# Altium PCB ramps.PcbDoc (part 2 of 2)
Units mil, origin at the board's own origin, x right, y up, seen from the top; angles counter-clockwise.
Board outline 3937.01 x 2440.94 mil, 2 copper layers (Top Layer, Bottom Layer); 96 components, 138 nets, 478 pads, 27 vias.
Unrouted connection lines stored in the file: 1.
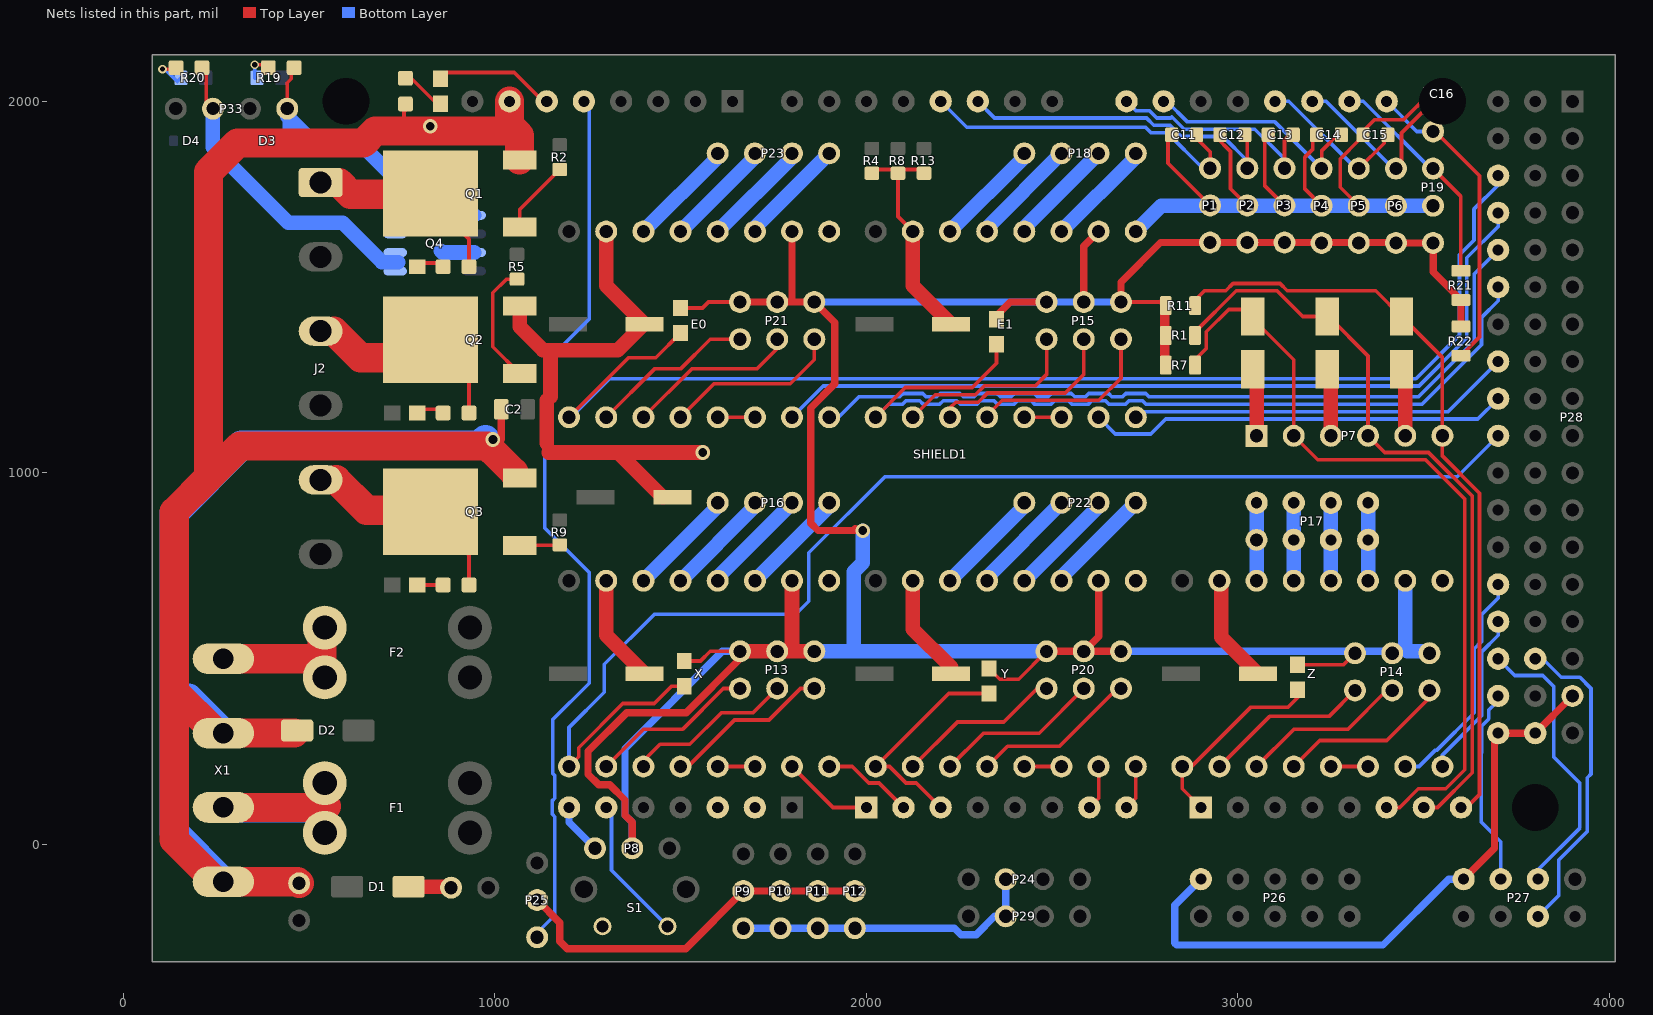
[diagram p2: the nets of this part, all layers, seen from the top]

## Via types
v1: diameter 23.62, hole 13.78, Top Layer to Bottom Layer, 20 vias
v2: diameter 39.37, hole 23.62, Top Layer to Bottom Layer, 6 vias
v3: diameter 50, hole 28, Top Layer to Bottom Layer, 1 vias

## Nets (pads, with @x,y where several pads share a name; then routed paths per layer and width w, separated by ;. In a path a pad name is that pad's centre, name@x,y a point inside that pad or via, vN(x,y) a via of type N, cw(c..) or ccw(c..) an arc to the next point about the centre after c; other vN are vias at no path point) (continued)
E0-DIR: E0.DIR SHIELD1.28 | length 2144.3
  Bottom Layer w9.84: E0.DIR@1900,1150 1925,1150 1980,1205 2089.52,1205 2098.5,1213.98 2151.5,1213.98 2160.48,1205 2189.52,1205 2198.5,1213.98 2251.5,1213.98 2260.48,1205 2289.52,1205 2298.5,1213.98 2351.5,1213.98 2360.48,1205 2389.52,1205 2398.5,1213.98 2451.5,1213.98 2460.48,1205 2489.52,1205 2498.5,1213.98 2551.5,1213.98 2560.48,1205 2589.52,1205 2598.5,1213.98 2651.5,1213.98 2660.48,1205 2689.52,1205 2698.5,1213.98 2751.5,1213.98 2760.48,1205 3485.68,1205 3635.55,1354.87 3635.55,1535.55 SHIELD1.28@3700,1600
E0-EN: E0.ENABLE R18.1 SHIELD1.24 | length 3353.5
  Top Layer w9.84: E0.ENABLE@1200,1150 1360,1310 1433.46,1310 R18.1@1500,1376.54
  Bottom Layer w9.84: E0.ENABLE@1200,1150 1205,1150 1308.74,1253.74 3478.74,1253.74 3596.18,1371.18 3596.18,1587.33 3635,1626.14 3635,1710 3700,1775 SHIELD1.24@3700,1800
E0-STEP: E0.STEP SHIELD1.26 | length 2275.9
  Bottom Layer w9.84: E0.STEP@1800,1150 1884.05,1234.06 3486.89,1234.06 3615.87,1363.03 3615.87,1579.17 3700,1663.31 SHIELD1.26@3700,1700
E1-DIR: E1.DIR SHIELD1.34 | length 1037.1
  Bottom Layer w9.84: E1.DIR@2725,1150 2740,1165 3565,1165 SHIELD1.34@3700,1300
E1-EN: E1.ENABLE R16.1 SHIELD1.30 | length 2373.3
  Top Layer w9.84: E1.ENABLE@2025,1150 2105,1230 2285,1230 2350,1295 R16.1@2350,1346.54
  Bottom Layer w9.84: E1.ENABLE@2025,1150 2060,1185 2097.36,1185 2106.65,1194.29 2143.35,1194.29 2152.32,1185.31 2197.68,1185.31 2206.65,1194.29 2243.35,1194.29 2252.32,1185.31 2297.68,1185.31 2306.65,1194.29 2343.35,1194.29 2352.32,1185.31 2397.68,1185.31 2406.65,1194.29 2443.35,1194.29 2452.32,1185.31 2497.68,1185.31 2506.65,1194.29 2543.35,1194.29 2552.32,1185.31 2597.68,1185.31 2606.65,1194.29 2643.35,1194.29 2652.32,1185.31 2697.68,1185.31 2706.65,1194.29 2743.35,1194.29 2752.64,1185 3495,1185 3655.24,1345.24 3655.24,1418.54 3700,1463.31 SHIELD1.30@3700,1500
E1-STEP: E1.STEP SHIELD1.36 | length 1133
  Bottom Layer w9.84: E1.STEP@2625,1150 2670,1105 2765,1105 2805.32,1145.31 3645.32,1145.31 SHIELD1.36@3700,1200
FAN1: D4.A LED5.C P33.2 Q4.5 Q4.6 | length 859.9
  Top Layer w9.84: LED5.C@223.98,2102.36 223.98,1994.13 P33.2@241.73,1976.38
  Bottom Layer w39.37: P33.2@241.73,1976.38 241.73,1876.38 444.88,1673.23 590.55,1673.23 696.85,1566.93 740.16,1566.93
FAN2: D3.A LED6.C P33.4 Q4.7 Q4.8 | length 729
  Top Layer w9.84: P33.4@441.73,1976.38 P33.4@441.73,1980.31 441.73,2049.96 452.76,2060.98 LED6.C@452.76,2102.36
  Bottom Layer w19.68: D3.A@438.98,1893.7 438.98,1977.56 P33.4@441.73,1980.31
  Bottom Layer w39.37: P33.4@441.73,1976.38 441.73,1959.84 527.56,1874.02 649.61,1874.02 732.28,1791.34 732.28,1657.48
FET1-: J2.1 LED4.C Q1.D | length 477.4
  Top Layer w9.84: Q1.D@810,1750 930.67,1629.33 LED4.C@930.67,1564.96
  Top Layer w78.74: J2.1@580.71,1781.5 612.2,1750 Q1.D@810,1750
FET2-: J2.3 LED3.C Q2.D | length 502.3
  Top Layer w9.84: Q2.D@826.77,1358.27 930.67,1254.37 LED3.C@930.67,1171.26
  Top Layer w78.74: J2.3@567.32,1381.5 638.82,1310 Q2.D@810,1310
FET3-: J2.5 LED2.C Q3.D | length 511.5
  Top Layer w9.84: Q3.D@810,900 930.67,779.33 LED2.C@930.67,708.66
  Top Layer w78.74: J2.5@573.62,981.5 655.12,900 Q3.D@810,900
GND: C1.- C2.2 C3.2 C4.2 C5.- C6.2 C7.2 C8.- C9.2 C10.2 C11.1 C12.1 C13.1 C14.1 C15.1 C16.1 D2.A E0.GND E0.GND2 E1.GND E1.GND2 LED1.C P1.2 P2.2 P3.2 P4.2 P5.2 P6.2 P7.1 P7.3 P7.5 P9.1 P10.1 P11.1 P12.1 P19.2 P24.2 P26.2 P27.7 P28.17 P29.2 P30.2 Q1.S Q2.S Q3.S Q4.1 Q4.3 R4.1 R8.1 R13.1 S1.1 SHIELD1.GND X1.2 X1.4 X.GND X.GND2 Y.GND Y.GND2 Z.GND Z.GND2 | length 15311.8
  Top Layer w9.84: 771.65,1923.94 755.91,1939.68 755.91,1972.87 LED1.C@775.59,1992.56 ; R4.1@2015,1816.54 R8.1@2085,1816.54 ; E1.GND@2125,1650 2085,1690 R8.1@2085,1816.54 ; R13.1@2155,1816.54 R8.1@2085,1816.54 ; C11.1@2811.54,1910 2811.54,1833.46 P1.2@2925,1720 ; C12.1@2941.54,1910 2941.54,1903.46 2980,1865 2980,1765 P2.2@3025,1720 ; C13.1@3071.54,1910 3071.54,1773.46 P3.2@3125,1720 ; C14.1@3201.54,1910 3201.54,1871.54 3180,1850 3180,1764 P4.2@3225,1719 ; P5.2@3325,1719 3275,1769 3275,1845 3326.54,1896.54 3326.54,1910 3366.54,1950 3445,1950 3515,2020 C16.1@3516.54,2020
  Top Layer w19.68: 1017.72,1090 C2.2@1017.72,1171.26 ; P27.7@3607,-93 3690,-10 3690,290 SHIELD1.GND@3700,300 SHIELD1.GND@3800,300 P28.17@3900,400
  Top Layer w39.37: Q2.S@1066.93,1448.82 1066.93,1393.07 1130,1330 1150,1330 ; 1140,1080 1140,1195 1150,1205 1150,1330 ; 1145,1055 1331.81,1055 ; X.GND@1300,710 1300,563.35 C7.2@1403.35,460 ; E0.GND@1300,1650 1300,1503.35 C3.2@1403.35,1400 1401.28,1400 1331.28,1330 1150,1330 ; C6.2@1451.77,935.04 1331.81,1055 ; v2(1560,1055) 1331.81,1055 ; Y.GND@2125,710 2125,580 2228.35,476.65 C9.2@2228.35,460 ; E1.GND@2125,1650 2125,1503.35 C4.2@2228.35,1400 ; Z.GND@2950,710 2955,705 2955,558.35 C10.2@3053.35,460 ; C5.-@3040,1279.13 3050,1269.13 P7.1@3050,1100 ; C1.-@3240,1279.13 3250,1269.13 P7.3@3250,1100 ; C8.-@3440,1279.13 3450,1269.13 P7.5@3450,1100
  Top Layer w78.74: D2.A@461.42,300 X1.2@269.68,300 250,300 137.8,412.2 ; P30.2@473.7,-104.09 469.61,-100 X1.4@269.68,-100 250,-100 137.8,12.2 137.8,412.2 ; 980.32,1072.83 314.96,1072.83 230,987.87 ; 992.13,1061.02 Q3.S@1051.18,1001.97 ; SHIELD1.GND@1040,2000 1040,1935 1055,1920 ; Q1.S@1066.93,1842.52 1066.93,1908.07 1055,1920 ; 137.8,412.2 137.8,895.67 230,987.87 ; 230,987.87 230,1810 307.8,1887.8 646.48,1887.8 678.68,1920 1055,1920
  Bottom Layer w19.68: P9.1@1669,-225 P10.1@1769,-225 P11.1@1869,-225 P12.1@1969,-225 2237.4,-225 2254.62,-242.21 2295.38,-242.21 2344.6,-193 P29.2@2375,-193 P24.2@2375,-93 ; P26.2@2900,-93 2830,-163 2830,-265 2835,-270 3390,-270 3567,-93 P27.7@3607,-93
  Bottom Layer w39.37: 854.33,1598.43 859.65,1593.11 Q4.3@944.88,1593.11 ; 862.2,1696.85 865.94,1693.11 Q4.1@944.88,1693.11 ; E1.GND2@2725,1650 2794,1719 P4.2@3225,1719 P5.2@3325,1719 P6.2@3425,1719 P19.2@3525,1719
  Bottom Layer w78.74: 175.98,393.7 X1.2@269.68,300 ; X1.4@269.68,-100 137.97,31.71 137.97,893.88 318.9,1074.8 960.12,1074.8 v2@975.32,1090
  other v2: 995,1090 826.77,1933.07
IOREF: P8.3 SHIELD1.IOREF | length 139
  Bottom Layer w19.68: SHIELD1.IOREF@1200,100 1200,60 P8.3@1270,-10
LED: R12.1 SHIELD1.13 | length 324.8
  Top Layer w9.84: R12.1@854.33,2061.02 871.06,2077.76 1052.24,2077.76 1130,2000 SHIELD1.13@1140,2000
MISO: P27.3 SHIELD1.50 | length 774.9
  Bottom Layer w9.84: SHIELD1.50@3700,500 3745,455 3820,455 3850,425 3850,235 3920,165 3920,45 3807,-68 P27.3@3807,-93
MOSI: P27.4 SHIELD1.51 | length 855.4
  Bottom Layer w9.84: SHIELD1.51@3800,500 3820,500 3870,450 3920,450 3950,420 3950,190 3940,180 3940,35 3862.71,-42.29 3862.71,-137.29 P27.4@3807,-193
NetD1_K: D1.K P32.2 | length 115.7
  Top Layer w39.37: D1.K@768.03,-113.39 880.16,-113.39 P32.2@882.68,-115.91
NetE0_1A: E0.1A P23.3 | length 292.8
  Bottom Layer w39.37: E0.1A@1600,1650 1800,1850 P23.3@1800,1860
NetE0_1B: E0.1B P23.4 | length 292.8
  Bottom Layer w39.37: E0.1B@1700,1650 1700,1660 P23.4@1900,1860
NetE0_2A: E0.2A P23.2 | length 292.8
  Bottom Layer w39.37: E0.2A@1500,1650 1700,1850 P23.2@1700,1860
NetE0_2B: E0.2B P23.1 | length 292.8
  Bottom Layer w39.37: E0.2B@1400,1650 1600,1850 P23.1@1600,1860
NetE0_MS1: E0.MS1 P21.1 | length 447
  Top Layer w9.84: E0.MS1@1300,1150 1430,1280 1500,1280 1580,1360 P21.1@1660,1360
NetE0_MS2: E0.MS2 P21.3 | length 461.6
  Top Layer w9.84: E0.MS2@1400,1150 1530,1280 1705,1280 1760,1335 P21.3@1760,1360
NetE0_MS3: E0.MS3 P21.5 | length 479.2
  Top Layer w9.84: E0.MS3@1500,1150 1590,1240 1795,1240 1860,1305 P21.5@1860,1360
NetE0_RESET: E0.RESET E0.SLEEP | length 100
  Top Layer w9.84: E0.RESET@1600,1150 E0.SLEEP@1700,1150
NetE1_1A: E1.1A P18.3 | length 292.8
  Bottom Layer w39.37: E1.1A@2425,1650 2425,1660 P18.3@2625,1860
NetE1_1B: E1.1B P18.4 | length 292.8
  Bottom Layer w39.37: E1.1B@2525,1650 2725,1850 P18.4@2725,1860
NetE1_2A: E1.2A P18.2 | length 292.8
  Bottom Layer w39.37: E1.2A@2325,1650 2325,1660 P18.2@2525,1860
NetE1_2B: E1.2B P18.1 | length 292.8
  Bottom Layer w39.37: E1.2B@2225,1650 2425,1850 P18.1@2425,1860
NetE1_MS1: E1.MS1 P15.1 | length 502.6
  Top Layer w9.84: E1.MS1@2125,1150 2185.32,1210.31 2293.15,1210.31 2317.84,1235 2455,1235 2485,1265 P15.1@2485,1360
NetE1_MS2: E1.MS2 P15.3 | length 517.3
  Top Layer w9.84: E1.MS2@2225,1150 2225,1175 2240.63,1190.63 2301.31,1190.63 2325.99,1215.31 2535.32,1215.31 2585,1265 P15.3@2585,1360
NetE1_MS3: E1.MS3 P15.5 | length 511.4
  Top Layer w9.84: E1.MS3@2325,1150 2325,1155 2365.63,1195.63 2625.63,1195.63 2685,1255 P15.5@2685,1360
NetE1_RESET: E1.RESET E1.SLEEP | length 100
  Top Layer w9.84: E1.RESET@2425,1150 E1.SLEEP@2525,1150
NetF1_1: F1.1 X1.3 | length 571.7
  Top Layer w39.37: X1.3@250,100 X1.3@269.68,100
  Top Layer w78.74: X1.3@269.68,100 543.46,100 546.77,103.31
  Bottom Layer w78.74: X1.3@269.68,100 271.42,98.27 542.52,98.27
NetF2_1: F2.1 X1.1 | length 333.9
  Top Layer w78.74: X1.1@250,500 535,500 F2.1@535,548.86
NetLED1_A: LED1.A R12.2 | length 107.1
  Top Layer w9.84: LED1.A@775.59,2062.09 844.12,1993.56 R12.2@854.33,1993.56
NetLED2_A: LED2.A R10.2 | length 69.3
  Top Layer w9.84: R10.2@796.87,698.66 LED2.A@866.14,698.66
NetLED3_A: LED3.A R6.2 | length 69.3
  Top Layer w9.84: R6.2@791.87,1171.26 LED3.A@861.14,1171.26
NetLED4_A: LED4.A R3.2 | length 69.3
  Top Layer w9.84: R3.2@791.87,1564.96 LED4.A@861.14,1564.96
NetLED5_A: LED5.A R20.2 | length 121.8
  Top Layer w9.84: v1(106.3,2086.61) 138.7,2086.61 LED5.A@154.45,2102.36
  Bottom Layer w9.84: v1(106.3,2086.61) 112.2,2086.61 145.67,2053.15 R20.2@155.51,2062.99
NetLED6_A: LED6.A R19.2 | length 69.8
  Top Layer w9.84: v1(354.33,2098.42) LED6.A@382.8,2098.42
  Bottom Layer w9.84: v1(354.33,2098.42) 354.33,2062.99 R19.2@360.24,2062.99
NetP13_1: P13.1 X.MS1 | length 447
  Top Layer w9.84: X.MS1@1300,210 1400,310 1505,310 1615,420 P13.1@1660,420
NetP13_3: P13.3 X.MS2 | length 455.8
  Top Layer w9.84: X.MS2@1400,210 1400,225 1445,270 1525,270 1610,355 1695,355 P13.3@1760,420
NetP13_5: P13.5 X.MS3 | length 447
  Top Layer w9.84: X.MS3@1500,210 1520,210 1645.32,335.32 1737.95,335.32 1822.64,420 P13.5@1860,420
NetP14_1: P14.1 Z.MS1 | length 449.9
  Top Layer w9.84: Z.MS1@2950,210 3085,345 3245,345 P14.1@3315,415
NetP14_3: P14.3 Z.MS2 | length 449.9
  Top Layer w9.84: Z.MS2@3050,210 3150,310 3295,310 3400,415 P14.3@3415,415
NetP14_5: P14.5 Z.MS3 | length 461.6
  Top Layer w9.84: Z.MS3@3150,210 3220,280 3400,280 3515,395 P14.5@3515,415
NetP16_1: P16.1 X.2B | length 292.8
  Bottom Layer w39.37: X.2B@1400,710 1600,910 P16.1@1600,920
NetP16_2: P16.2 X.2A | length 292.8
  Bottom Layer w39.37: X.2A@1500,710 1700,910 P16.2@1700,920
NetP16_3: P16.3 X.1A | length 292.8
  Bottom Layer w39.37: X.1A@1600,710 1600,720 P16.3@1800,920
NetP16_4: P16.4 X.1B | length 292.8
  Bottom Layer w39.37: X.1B@1700,710 1900,910 P16.4@1900,920
NetP17_1: P17.1 P17.2 Z.2B | length 210
  Bottom Layer w39.37: Z.2B@3050,710 P17.1@3050,820 P17.2@3050,920
NetP17_3: P17.3 P17.4 Z.2A | length 210
  Bottom Layer w39.37: Z.2A@3150,710 P17.3@3150,820 P17.4@3150,920
NetP17_5: P17.5 P17.6 Z.1A | length 210
  Bottom Layer w39.37: Z.1A@3250,710 P17.5@3250,820 P17.6@3250,920
NetP17_7: P17.7 P17.8 Z.1B | length 210
  Bottom Layer w39.37: Z.1B@3350,710 P17.7@3350,820 P17.8@3350,920
NetP20_1: P20.1 Y.MS1 | length 447
  Top Layer w9.84: Y.MS1@2125,210 2245,330 2370,330 2460,420 P20.1@2485,420
NetP20_3: P20.3 Y.MS2 | length 447
  Top Layer w9.84: Y.MS2@2225,210 2315,300 2465,300 P20.3@2585,420
NetP20_5: P20.5 Y.MS3 | length 447
  Top Layer w9.84: Y.MS3@2325,210 2380,265 2520,265 2675,420 P20.5@2685,420
NetP22_1: P22.1 Y.2B | length 282.8
  Bottom Layer w39.37: Y.2B@2225,710 P22.1@2425,910
NetP22_2: P22.2 Y.2A | length 302.8
  Bottom Layer w39.37: Y.2A@2325,710 2325,720 P22.2@2525,920 P22.2@2525,910
NetP22_3: P22.3 Y.1A | length 292.8
  Bottom Layer w39.37: Y.1A@2425,710 2625,910 P22.3@2625,920
NetP22_4: P22.4 Y.1B | length 292.8
  Bottom Layer w39.37: Y.1B@2525,710 2525,720 P22.4@2725,920
NetQ1_G: Q1.G R2.1 | length 199.9
  Top Layer w9.84: Q1.G@1066.93,1661.42 1066.93,1708.46 R2.1@1175,1816.54
NetQ2_G: Q2.G R5.1 | length 327.2
  Top Layer w9.84: R5.1@1060,1521.54 1031.54,1521.54 995,1485 995,1339.65 Q2.G@1066.93,1267.72
NetQ3_G: Q3.G R9.1 | length 108.7
  Top Layer w9.84: Q3.G@1066.93,805.12 1173.58,805.12 R9.1@1175,806.54
NetX_RESET: X.RESET X.SLEEP | length 100
  Top Layer w9.84: X.RESET@1600,210 X.SLEEP@1700,210
NetY_RESET: Y.RESET Y.SLEEP | length 100
  Top Layer w9.84: Y.RESET@2425,210 Y.SLEEP@2525,210
NetZ_RESET: Z.RESET Z.SLEEP | length 100
  Top Layer w9.84: Z.RESET@3250,210 Z.SLEEP@3350,210
PS-ON: P25.3 SHIELD1.12 | length 2426.5
  Bottom Layer w9.84: P25.3@1102.36,-249.21 1161.42,-190.16 1161.42,75.28 1155.24,81.46 1155.24,118.54 1161.42,124.72 1161.42,185.95 1155.71,191.65 1155.71,335.71 1254.13,434.13 1254.13,732.42 1135,851.56 1135,1295 1254.13,1414.13 1254.13,1985.87 SHIELD1.12@1240,2000
RESET: S1.2 SHIELD1.RESET | length 388.3
  Bottom Layer w9.84: SHIELD1.RESET@1300,100 1314.29,85.71 1314.29,-69.29 S1.2@1465,-220
SCK: P27.5 SHIELD1.52 | length 536.3
  Bottom Layer w9.84: SHIELD1.52@3700,400 3694.61,400 3694.61,381.77 3674.92,362.08 3674.92,338.23 3655.24,318.54 3655.24,247.4 3655,247.16 3655,60 3707,8 P27.5@3707,-93
SCL: P19.4 R22.2 SHIELD1.SCL | length 837.9
  Top Layer w9.84: P19.4@3525,1919 3531,1919 3650,1800 3650,1365.63 R22.2@3600,1315.63
  Bottom Layer w9.84: SHIELD1.SCL@3400,2000 3481,1919 P19.4@3525,1919
SDA: P19.3 R21.2 SHIELD1.SDA | length 605.7
  Top Layer w9.84: P19.3@3525,1819 3599,1745 3599,1545.37 R21.2@3600,1544.37
  Bottom Layer w9.84: SHIELD1.SDA@3300,2000 3336.69,2000 3517.69,1819 P19.3@3525,1819
SERVO_5V: P9.2 P10.2 P11.2 P12.2 P25.2 | length 1014.3
  Top Layer w19.68: P25.2@1102.36,-149.21 1114.21,-149.21 1175,-210 1175,-260 1195,-280 1514,-280 P9.2@1669,-125 P10.2@1769,-125 P11.2@1869,-125 P12.2@1969,-125
THERM0: C5.+ P7.2 R7.2 SHIELD1.A13 | length 2138.1
  Top Layer w9.84: R7.2@2884.37,1290 2884.37,1304.37 2914.88,1334.88 2914.88,1379.88 2975,1440 3021,1440 C5.+@3040,1421 3040,1415 3150,1305 P7.2@3150,1100 3214.68,1035.31 3504.68,1035.31 3610,930 3610,201.14 3558.86,150 3485,150 3435,100 SHIELD1.A13@3400,100
THERM1: C1.+ P7.4 R1.2 SHIELD1.A14 | length 2068.7
  Top Layer w9.84: R1.2@2884.37,1370 2884.37,1379.37 2995,1490 3105,1490 3174,1421 C1.+@3240,1421 3244,1421 3350,1315 P7.4@3350,1100 3395,1055 3512.84,1055 3630,937.84 3630,193.31 3536.69,100 SHIELD1.A14@3500,100
THERM2: C8.+ P7.6 R11.2 SHIELD1.A15 | length 2063
  Top Layer w9.84: R11.2@2884.37,1450 2884.37,1464.37 2910,1490 2967.16,1490 2986.85,1509.68 3113.15,1509.68 3132.84,1490 3371,1490 C8.+@3440,1421 3550,1311 P7.6@3550,1100 3550,1045.68 3650,945.68 3650,135 3615,100 SHIELD1.A15@3600,100
V_LOGIC: E0.VDD E1.VDD P1.3 P2.3 P3.3 P4.3 P5.3 P6.3 P8.2 P13.2 P13.4 P13.6 P14.2 P14.4 P14.6 P15.2 P15.4 P15.6 P19.1 P20.2 P20.4 P20.6 P21.2 P21.4 P21.6 R1.1 R7.1 R11.1 R14.2 R15.2 R16.2 R17.2 R18.2 R21.1 R22.1 X.VDD Y.VDD Z.VDD | length 9038.7
  Top Layer w9.84: R18.2@1500,1444 1559,1444 1575,1460 P21.2@1660,1460 ; R14.2@1510,494 1554,494 1580,520 P13.2@1660,520 ; R17.2@2330,474 2359,445 2410,445 P20.2@2485,520 ; P15.6@2685,1460 2795.63,1460 2795.63,1300 R7.1@2805.63,1290 ; R15.2@3160,484 3284,484 P14.2@3315,515
  Top Layer w19.68: P8.2@1370,-10 1370,59.73 1350.32,79.42 1350.32,119.95 1309.48,160.79 1279.62,160.79 1250.79,189.62 1250.79,250.79 1355,355 1515,355 1660,500 P13.2@1660,520 ; P21.2@1660,1460 P21.4@1760,1460 1800,1460 ; E0.VDD@1800,1650 1800,1460 ; 1970,850 1975,845 v2(1990,845) 1870,845 1850,865 1850,1175 1915,1240 1915,1405 P21.6@1860,1460 1800,1460 ; R16.2@2345.53,1418.47 2387.05,1460 P15.2@2485,1460 ; P20.2@2485,520 P20.4@2585,520 ; P15.4@2585,1460 2585,1610 E1.VDD@2625,1650 ; Y.VDD@2625,710 2625,560 P20.4@2585,520 ; P20.6@2685,520 P20.4@2585,520 ; P15.6@2685,1460 2685,1513.35 2791.65,1620 P1.3@2925,1620 P2.3@3025,1620 P3.3@3125,1620 3424,1620 P6.3@3425,1619 P19.1@3525,1619 3525,1540.63 R21.1@3600,1465.63 R22.1@3600,1394.37 ; R11.1@2795.63,1460 R11.1@2805.63,1450 R1.1@2805.63,1370 R7.1@2805.63,1290
  Top Layer w39.37: P13.2@1660,520 P13.4@1760,520 1800,520 ; X.VDD@1800,710 1800,520 ; P13.6@1860,520 1800,520
  Bottom Layer w19.68: P8.2@1370,-10 1370,59.73 1350.32,79.42 1350.32,257.8 1612.52,520 P13.2@1660,520 ; P21.6@1860,1460 P15.2@2485,1460 P15.4@2585,1460 P15.6@2685,1460 ; P20.6@2685,520 3410,520 P14.4@3415,515
  Bottom Layer w39.37: P13.6@1860,520 1960,520 ; v2(1990,845) 1990,758.52 1965.94,734.46 1965.94,525.94 1960,520 ; P20.2@2485,520 1960,520 ; Z.VDD@3450,710 3450,525 3455,520 3510,520 P14.6@3515,515
X-DIR: SHIELD1.A1 X.DIR | length 245.6
  Top Layer w9.84: X.DIR@1900,210 1962.36,210 2006.65,165.71 2034.29,165.71 SHIELD1.A1@2100,100
X-EN: R14.1 SHIELD1.38 X.ENABLE | length 3464.5
  Top Layer w9.84: X.ENABLE@1200,210 1226.18,236.18 1226.18,260.98 1344.81,379.61 1429.61,379.61 1476.54,426.54 R14.1@1510,426.54
  Bottom Layer w9.84: X.ENABLE@1200,210 1200,315 1295,410 1295,485 1430,620 1810,620 1845,655 1845,785 2050,990 3590,990 SHIELD1.38@3700,1100
X-MAX: C12.2 P2.1 SHIELD1.2 | length 923.1
  Top Layer w9.84: SHIELD1.2@2300,2000 SHIELD1.2@2315,2000 ; C12.2@3008.46,1910 3025,1893.46 P2.1@3025,1820
  Bottom Layer w9.84: SHIELD1.2@2300,2000 2345,1955 2753.86,1955 2773.3,1935.55 2817.29,1935.55 2847.52,1905.31 2959.68,1905.31 3025,1840 P2.1@3025,1820
X-MIN: C11.2 P1.1 SHIELD1.3 | length 908.8
  Top Layer w9.84: C11.2@2878.46,1910 2925,1863.46 P1.1@2925,1820
  Bottom Layer w9.84: SHIELD1.3@2200,2000 2270,1930 2751.02,1930 2765.15,1915.87 2809.13,1915.87 2905,1820 P1.1@2925,1820
X-STEP: SHIELD1.A0 X.STEP | length 245.6
  Top Layer w9.84: X.STEP@1800,210 1910,100 SHIELD1.A0@2000,100
Y-DIR: SHIELD1.A7 Y.DIR | length 120.4
  Top Layer w9.84: SHIELD1.A7@2700,100 2725,125 Y.DIR@2725,210
Y-EN: R17.1 SHIELD1.A2 Y.ENABLE | length 607
  Top Layer w9.84: SHIELD1.A2@2200,100 2134.29,165.71 2106.65,165.71 2062.36,210 Y.ENABLE@2025,210 2221.54,406.54 R17.1@2330,406.54
Y-MAX: C14.2 P4.1 SHIELD1.RX3 | length 616.9
  Top Layer w9.84: SHIELD1.RX3@2800,2000 SHIELD1.RX3@2805.63,1994.37 ; P4.1@3225,1819 3225,1866.54 C14.2@3268.46,1910
  Bottom Layer w9.84: SHIELD1.RX3@2800,2000 2808.52,2000 2863.83,1944.68 3099.32,1944.68 P4.1@3225,1819
Y-MIN: C13.2 P3.1 SHIELD1.TX3 | length 612.8
  Top Layer w9.84: P3.1@3125,1820 3125,1896.54 C13.2@3138.46,1910
  Bottom Layer w9.84: SHIELD1.TX3@2700,2000 2725.32,1974.68 2762.01,1974.68 2781.46,1955.24 2818.54,1955.24 2821.99,1958.69 2855.68,1925 3045.32,1925 3125,1845.31 P3.1@3125,1820
Y-STEP: SHIELD1.A6 Y.STEP | length 120.4
  Top Layer w9.84: SHIELD1.A6@2600,100 2625,125 Y.STEP@2625,210
Z-DIR: SHIELD1.48 Z.DIR | length 452.1
  Bottom Layer w9.84: Z.DIR@3550,210 3550,241.14 3655.24,346.38 3655.24,518.54 3700,563.31 SHIELD1.48@3700,600
Z-EN: R15.1 SHIELD1.A8 Z.ENABLE | length 538.9
  Top Layer w9.84: SHIELD1.A8@2900,100 2850,150 Z.ENABLE@2850,210 2875,210 3035,370 3135,370 3160,395 R15.1@3160,416.54
Z-MAX: C16.2 P6.1 SHIELD1.RX1 | length 595.8
  Top Layer w9.84: SHIELD1.RX1@3200,2000 SHIELD1.RX1@3206.64,2000 ; P6.1@3425,1819 3440,1834 3440,1915 3495,1970 3533.46,1970 C16.2@3583.46,2020
  Bottom Layer w9.84: SHIELD1.RX1@3200,2000 3236.69,2000 3417.69,1819 P6.1@3425,1819
Z-MIN: C15.2 P5.1 SHIELD1.TX1 | length 426
  Top Layer w9.84: SHIELD1.TX1@3100,2000 SHIELD1.TX1@3106.64,2000 ; P5.1@3325,1819 3393.46,1887.46 C15.2@3393.46,1910
  Bottom Layer w9.84: SHIELD1.TX1@3100,2000 3136.69,2000 3317.69,1819 P5.1@3325,1819
Z-STEP: SHIELD1.46 Z.STEP | length 617.6
  Bottom Layer w9.84: Z.STEP@3450,210 3487.36,210 3531.65,254.29 3535.31,254.29 3635.55,354.53 3635.55,526.7 3655.24,546.38 3655.24,618.54 3700,663.31 SHIELD1.46@3700,700
pads on no net: C2.0 C11.0 C12.0 C13.0 C14.0 C15.0 C16.0 D1.0 D2.0 D3.0 D4.0 P27.8 Q4.0 R1.0 R2.0 R4.0 R5.0 R7.0 R8.0 R9.0 R11.0 R13.0 R19.0 R20.0 R21.0 R22.0 S1.GND1 S1.GND2 SHIELD1.0

## Polygon pours and split planes (outlines as drawn)
+12V on Top Layer "12V" (solid, remove dead copper, pour order 6): 78.74,2130 78.74,-314.96 4015.75,-314.96 4015.75,2130
FET3- on Top Layer "FET3-" (solid, remove dead copper, pour order 2): 462.6,1013.78 462.6,846.46 748.03,846.46 748.03,1013.78
GND on Top Layer "GND" (solid, remove dead copper, pour order 0): 1023.62,885.83 1023.62,1122.05 1151.57,1122.05 1161.42,1112.2 1161.42,885.83
GND on Bottom Layer "GND" (solid, remove dead copper, pour order 4): 78.74,2130 78.74,-314.96 4015.75,-314.96 4015.75,2130

## Keep-outs
Keep-Out Layer:
  lines w7.87: 78.74,-314.96 78.74,2125.98 503.94,2125.98 4015.75,2125.98 4015.75,-314.96 78.74,-314.96

## Silkscreen, mask and mechanical layers (free items; w line width, h text height)
Top Overlay:
  lines w7.87: 1325,1701.18 1325,1950 ; 1535,761.18 1535,1098.82 ; 1690,1950 1750,1950 ; 1850,50 3650,50 4010.75,50 ; 1951.97,158.82 1973.82,158.82 ; 1951.97,1948.03 1951.97,1701.18 1973.82,1701.18 ; 1973.82,761.18 1951.97,761.18 1951.97,1098.82 1973.82,1098.82 ; 2135,-314.96 2135,50 ; 2550,1950 2650,1950 ; 2735,-314.96 2735,50 ; 2776.97,158.82 2798.82,158.82 ; 2776.97,1098.82 2776.97,761.18 2798.82,761.18 ; 2776.97,1701.18 2776.97,1948.03 ; 3000,1150 3000,1190 ; 3200,1150 3200,1190 ; 3400,1150 3400,1190 ; 3495,-314.96 3495,50 ; 3600,1150 3600,1190
  lines w27.56: 95,1100 345,1100 ; 95,1500 345,1500 ; 669.29,678.5 98.5,678.5 95,682.01 95,1900 669.29,1900
  text "-" at 229.92,2035.43 h78.74
  text "-" at 429.92,2035.43 h78.74
  text "+" at 125.98,2027.56 h78.74
  text "+" at 325.98,2027.56 h78.74
  text "I2C" at 3633.86,1822.83 h39.37 r90
  text "E0" at 1390,1820 h78.74
  text "E1" at 2215,1820 h78.74
  text "2B" at 1570,1750 h39.37
  text "2A" at 1670,1750 h39.37
  text "1A" at 1770,1750 h39.37
  text "1B" at 1870,1750 h39.37
  text "2B" at 2395,1750 h39.37
  text "2A" at 2495,1750 h39.37
  text "1A" at 2595,1750 h39.37
  text "1B" at 2695,1750 h39.37
  text "D10" at 220,1640 h155 r90
  text "+" at 231.5,1531.5 h155
  text "X-" at 2944.88,1496.06 h39.37 r90
  text "X+" at 3044.88,1496.06 h39.37 r90
  text "Y-" at 3144.88,1496.06 h39.37 r90
  text "Y+" at 3244.88,1495.06 h39.37 r90
  text "Z-" at 3344.88,1495.06 h39.37 r90
  text "Z+" at 3444.88,1495.06 h39.37 r90
  text "D9" at 220,1315 h155 r90
  text "T0" at 3050,1160 h59.06
  text "T1" at 3250,1160 h59.06
  text "T2" at 3450,1160 h59.06
  text "+" at 321.5,1146.5 h155 r90
  text "2B" at 1570,985 h39.37
  text "2A" at 1670,985 h39.37
  text "1A" at 1770,985 h39.37
  text "1B" at 1870,985 h39.37
  text "2B" at 2395,985 h39.37
  text "2A" at 2495,985 h39.37
  text "1A" at 2595,985 h39.37
  text "1B" at 2695,985 h39.37
  text "2B" at 3020,985 h39.37
  text "2A" at 3120,985 h39.37
  text "1A" at 3220,985 h39.37
  text "1B" at 3320,985 h39.37
  text "D8" at 220,920 h155 r90
  text "Y" at 2215,880 h78.74
  text "Z" at 2920,880 h78.74
  text "X" at 1560,780 h78.74
  text "+" at 231.5,744.5 h155
  text "+" at 353.9,449.5 h155
  text "A" at 685.35,309.92 h78.74
  text "-" at 420.79,282.2 h155 r90
  text "+" at 353.9,49.5 h155
  text "AUX-3" at 3807.68,-18.31 h39.37
  text "-" at 420.79,-117.8 h155 r90
  text "RAMPS 1.4.3" at 556.85,-246.93 h47.24
  text "SERVOS" at 2115,-255 h39.37 r90
  text "AUX-1" at 2715,-275 h39.37 r90
  text "AUX-2" at 3475,-275 h39.37 r90
  text "PS-ON" at 1199.37,-279.68 h27.56 r90
Bottom Overlay:
  lines w7.87: 539.21,-35.2 521.57,-35.2 521.57,-264.57 1050.71,-264.57 1051.18,-264.09 1051.18,-35.2 ; 919.69,257.01 1597.48,257.01 ; 1103.62,257.01 1103.62,70.55 1225.83,-51.65 1271.18,-51.65 1288.82,-69.29 1344.25,-69.29 1361.89,-51.65 1371.18,-51.65 1388.82,-69.29 1444.25,-69.29 1461.89,-51.65
  text "GPL" at 120.94,1641.73 h39.37 r270
  text "RAMPS V1.4.3 by Aus3D, see / wiki.aus3d.com.au/RAMPS / For full documentation" at 143.62,661.1 h39.37 r270
  text "Logic Voltage: / 1: 5V (Mega R1, R2, R3) / 2: IOREF (Mega R3, Due)" at 1605.04,262.05 h31.5
  text "2" at 1330.39,-57.95 h31.5
  text "1" at 1423.62,-57.95 h31.5
  text "12V:Jumper / >12V:Open" at 831.5,-178.9 h31.5
  text "VIN to Arduino" at 1020.47,-239.37 h31.5
Mechanical 16:
  drawing of 1873 lines, arcs and shapes, not listed
  text "2" at 546.84,4512.24 h70
  text "3" at 3426.84,4512.24 h70
  text "4" at 6296.84,4512.24 h70
  text "A" at -3665.16,3606.24 h70
  text "B" at -3665.16,1714.24 h70
  text "B" at 7634.84,1714.24 h70
  text "C" at -3665.16,-195.76 h70
  text "C" at 7634.84,-195.76 h70
  text "ENGINEER:" at 3109.84,-1652.76 h45
  text "TITLE:" at 4609.84,-1652.76 h45
  text "PCB DESIGNER:" at 3109.84,-1947.76 h45
  text "D" at -3665.16,-2085.76 h70
  text "D" at 7634.84,-2085.76 h70
  text "DATE:" at 3109.84,-2252.76 h45
  text "PART NO.:" at 4609.84,-2252.76 h45
  text "REV:" at 6709.84,-2252.76 h45
  text "Altium Limited" at 1809.84,-2352.76 h70
  text ".PRINT_DATE" at 3159.84,-2372.76 h70
  text "12a Rodborough Rd" at 1809.84,-2452.76 h70
  text "Frenchs Forest" at 1809.84,-2552.76 h70
  text "FILE NAME:" at 3109.84,-2552.76 h45
  text "DWG NO:" at 4609.84,-2552.76 h45
  text "SCALE:" at 6709.84,-2552.76 h45
  text "NSW 2086" at 1809.84,-2652.76 h70
  text ".PCB_FILE_NAME_NO_PATH" at 3159.84,-2672.76 h70
  text "1" at -2313.16,-2887.76 h70
  text "2" at 546.84,-2887.76 h70
  text "3" at 3426.84,-2887.76 h70
  text "4" at 6296.84,-2887.76 h70

## Dimensions
78.74,-314.96 to 78.74,2125.98 on Mechanical 1
4015.75,2125.98 to 4015.75,-314.96 on Mechanical 1
78.74,2125.98 to 4015.75,2125.98 on Mechanical 1

## Text inside footprints (layer, text, board x,y; h text height)
E0: Top Overlay "GND" at 1909.84,1520.47 h27.56 r90; Top Overlay "VDD" at 1809.84,1520.47 h27.56 r90; Top Overlay "1B" at 1709.84,1550 h27.56 r90; Top Overlay "1A" at 1609.84,1550 h27.56 r90; Top Overlay "2A" at 1509.84,1544.09 h27.56 r90; Top Overlay "2B" at 1409.84,1544.09 h27.56 r90; Top Overlay "GND" at 1309.84,1520.47 h27.56 r90; Top Overlay "Vmot" at 1209.84,1500.79 h27.56 r90; Top Overlay "EN" at 1209.84,1200.79 h27.56 r90; Top Overlay "MS1" at 1309.84,1200.79 h27.56 r90; Top Overlay "MS2" at 1409.84,1200.79 h27.56 r90; Top Overlay "MS3" at 1509.84,1200.79 h27.56 r90; Top Overlay "RS" at 1609.84,1200.79 h27.56 r90; Top Overlay "SLP" at 1709.84,1200.79 h27.56 r90; Top Overlay "STP" at 1809.84,1200.79 h27.56 r90; Top Overlay "DIR" at 1909.84,1200.79 h27.56 r90
E1: Top Overlay "DIR" at 2734.84,1200.79 h27.56 r90; Top Overlay "STP" at 2634.84,1200.79 h27.56 r90; Top Overlay "SLP" at 2534.84,1200.79 h27.56 r90; Top Overlay "RS" at 2434.84,1200.79 h27.56 r90; Top Overlay "MS3" at 2334.84,1200.79 h27.56 r90; Top Overlay "MS2" at 2234.84,1200.79 h27.56 r90; Top Overlay "MS1" at 2134.84,1200.79 h27.56 r90; Top Overlay "EN" at 2034.84,1200.79 h27.56 r90; Top Overlay "Vmot" at 2034.84,1500.79 h27.56 r90; Top Overlay "GND" at 2134.84,1520.47 h27.56 r90; Top Overlay "2B" at 2234.84,1544.09 h27.56 r90; Top Overlay "2A" at 2334.84,1544.09 h27.56 r90; Top Overlay "1A" at 2434.84,1550 h27.56 r90; Top Overlay "1B" at 2534.84,1550 h27.56 r90; Top Overlay "VDD" at 2634.84,1520.47 h27.56 r90; Top Overlay "GND" at 2734.84,1520.47 h27.56 r90
X: Top Overlay "GND" at 1909.84,580.47 h27.56 r90; Top Overlay "VDD" at 1809.84,580.47 h27.56 r90; Top Overlay "1B" at 1709.84,610 h27.56 r90; Top Overlay "1A" at 1609.84,610 h27.56 r90; Top Overlay "2A" at 1509.84,604.09 h27.56 r90; Top Overlay "2B" at 1409.84,604.09 h27.56 r90; Top Overlay "GND" at 1309.84,580.47 h27.56 r90; Top Overlay "Vmot" at 1209.84,560.79 h27.56 r90; Top Overlay "EN" at 1209.84,260.79 h27.56 r90; Top Overlay "MS1" at 1309.84,260.79 h27.56 r90; Top Overlay "MS2" at 1409.84,260.79 h27.56 r90; Top Overlay "MS3" at 1509.84,260.79 h27.56 r90; Top Overlay "RS" at 1609.84,260.79 h27.56 r90; Top Overlay "SLP" at 1709.84,260.79 h27.56 r90; Top Overlay "STP" at 1809.84,260.79 h27.56 r90; Top Overlay "DIR" at 1909.84,260.79 h27.56 r90
X1: Top Overlay "1" at 244.68,580 h77.5 r270; Top Overlay "2" at 244.68,390 h77.5 r270; Top Overlay "3" at 244.68,190 h77.5 r270; Top Overlay "4" at 244.68,-10 h77.5 r270
Y: Top Overlay "DIR" at 2734.84,260.79 h27.56 r90; Top Overlay "STP" at 2634.84,260.79 h27.56 r90; Top Overlay "SLP" at 2534.84,260.79 h27.56 r90; Top Overlay "RS" at 2434.84,260.79 h27.56 r90; Top Overlay "MS3" at 2334.84,260.79 h27.56 r90; Top Overlay "MS2" at 2234.84,260.79 h27.56 r90; Top Overlay "MS1" at 2134.84,260.79 h27.56 r90; Top Overlay "EN" at 2034.84,260.79 h27.56 r90; Top Overlay "Vmot" at 2034.84,560.79 h27.56 r90; Top Overlay "GND" at 2134.84,580.47 h27.56 r90; Top Overlay "2B" at 2234.84,604.09 h27.56 r90; Top Overlay "2A" at 2334.84,604.09 h27.56 r90; Top Overlay "1A" at 2434.84,610 h27.56 r90; Top Overlay "1B" at 2534.84,610 h27.56 r90; Top Overlay "VDD" at 2634.84,580.47 h27.56 r90; Top Overlay "GND" at 2734.84,580.47 h27.56 r90
Z: Top Overlay "GND" at 3559.84,580.47 h27.56 r90; Top Overlay "VDD" at 3459.84,580.47 h27.56 r90; Top Overlay "1B" at 3359.84,610 h27.56 r90; Top Overlay "1A" at 3259.84,610 h27.56 r90; Top Overlay "2A" at 3159.84,604.09 h27.56 r90; Top Overlay "2B" at 3059.84,604.09 h27.56 r90; Top Overlay "GND" at 2959.84,580.47 h27.56 r90; Top Overlay "Vmot" at 2859.84,560.79 h27.56 r90; Top Overlay "EN" at 2859.84,260.79 h27.56 r90; Top Overlay "MS1" at 2959.84,260.79 h27.56 r90; Top Overlay "MS2" at 3059.84,260.79 h27.56 r90; Top Overlay "MS3" at 3159.84,260.79 h27.56 r90; Top Overlay "RS" at 3259.84,260.79 h27.56 r90; Top Overlay "SLP" at 3359.84,260.79 h27.56 r90; Top Overlay "STP" at 3459.84,260.79 h27.56 r90; Top Overlay "DIR" at 3559.84,260.79 h27.56 r90